# Altium PCB RSD_M1_LED_TURN_LEFT_V2.PcbDoc
Units mm, origin at the board's own origin, x right, y up, seen from the top; angles counter-clockwise.
Board outline 79.21 x 29.58 mm, 2 copper layers (Top Layer, Bottom Layer), stack 0.871 mm thick; 29 components, 45 nets, 68 pads, 25 vias.
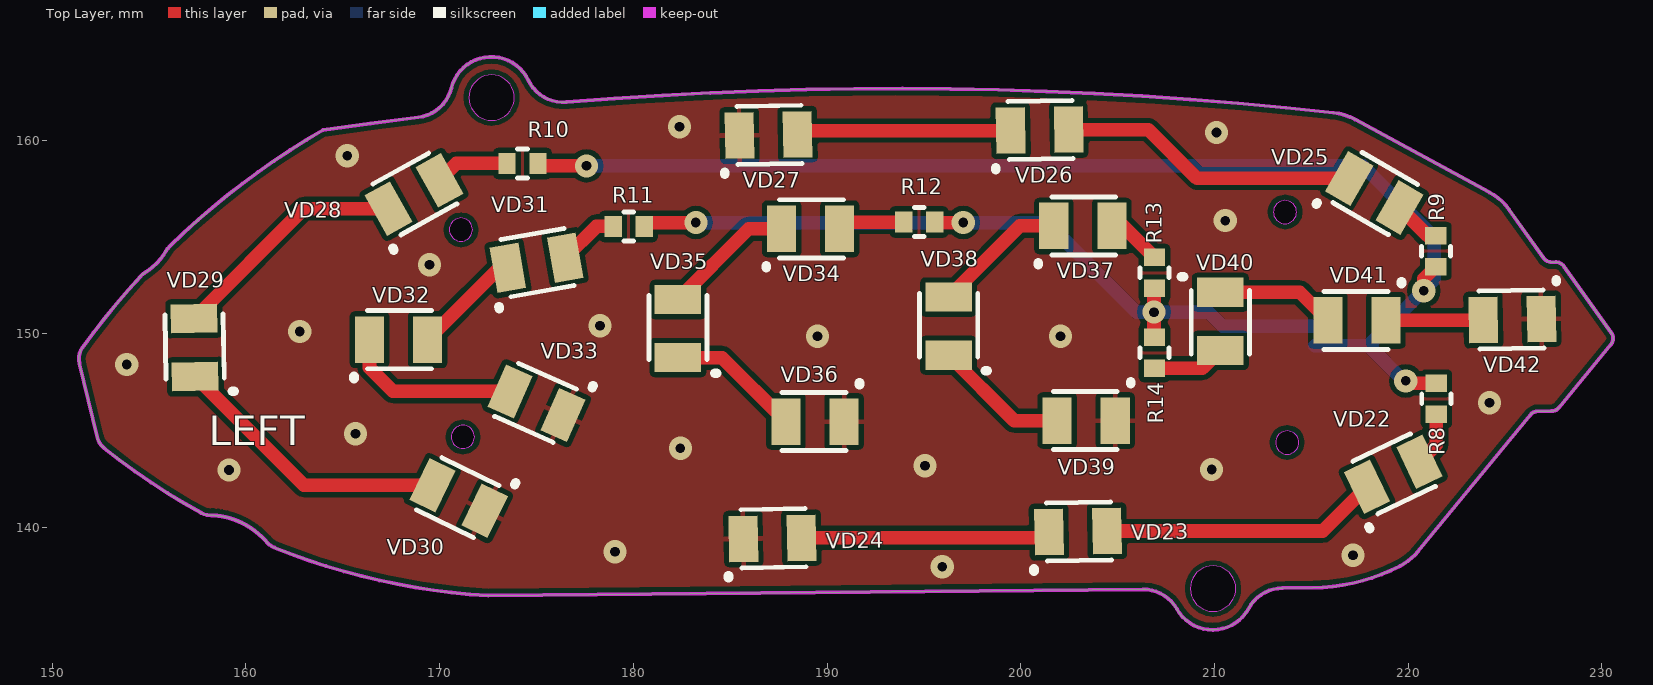
[diagram p0: Top Layer view]
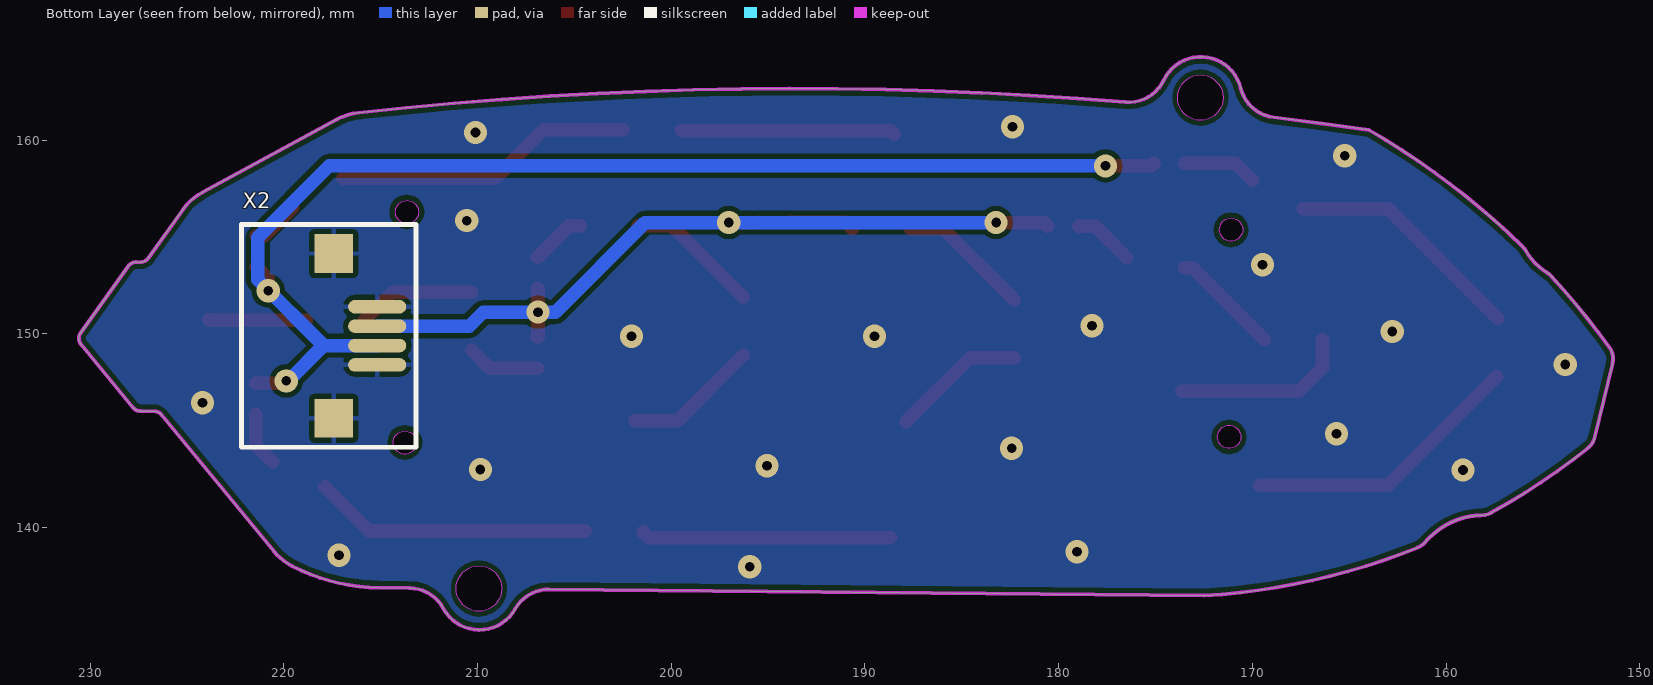
[diagram p1: Bottom Layer view, seen from below]
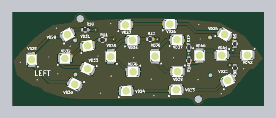
[diagram p2: 3D render of the assembled board from above, using the file's embedded part models]

## Layer stack, top to bottom
Top Solder: solder mask 0.0102, Solder Resist, Dk 3.5
Top Layer: signal copper 0.0356
Dielectric 1: dielectric 0.8, FR-4, Dk 4.8
Bottom Layer: signal copper 0.0356
Bottom Solder: solder mask 0.0102, Solder Resist, Dk 3.5

## Board outline
416 vertices, not listed, extent 151.371,134.721 230.579,164.303
cut-out: 213.038,156.291 ccw(c213.638,156.291) 213.638,155.691 ccw(c213.638,156.291) 214.238,156.291 ccw(c213.638,156.291) 213.638,156.891 ccw(c213.638,156.291)
cut-out: 213.152,144.392 ccw(c213.752,144.392) 213.752,143.792 ccw(c213.752,144.392) 214.352,144.392 ccw(c213.752,144.392) 213.752,144.992 ccw(c213.752,144.392)
cut-out: 208.749,136.855 ccw(c209.924,136.855) 209.924,135.68 ccw(c209.924,136.855) 211.099,136.855 ccw(c209.924,136.855) 209.924,138.03 ccw(c209.924,136.855)
cut-out: 170.597,144.685 ccw(c171.197,144.685) 171.197,144.085 ccw(c171.197,144.685) 171.797,144.685 ccw(c171.197,144.685) 171.197,145.285 ccw(c171.197,144.685)
cut-out: 170.495,155.385 ccw(c171.095,155.385) 171.095,154.785 ccw(c171.095,155.385) 171.695,155.385 ccw(c171.095,155.385) 171.095,155.985 ccw(c171.095,155.385)
cut-out: 171.505,162.2 ccw(c172.68,162.2) 172.68,161.025 ccw(c172.68,162.2) 173.855,162.2 ccw(c172.68,162.2) 172.68,163.375 ccw(c172.68,162.2)

## Design rules (kind name [scope] priority, off if disabled: settings)
Clearance [All] p1: gap=0.254 ignorepadtopadclearanceinfootprint=FALSE except(0: Arc-Hole Track-Hole SMDPad-Hole THPad-Hole Via-Hole Fill-Hole Poly-Hole Region-Hole Text-Hole)
PolygonConnect [All] p1: thpad.connectstyle=Relief thpad.reliefconductorwidth=0.254 thpad.reliefentries=4 thpad.polygonreliefangle="90 Angle" thpad.airgapwidth=0.254 smdpad.connectstyle=Relief smdpad.reliefconductorwidth=0.254 smdpad.reliefentries=4 smdpad.polygonreliefangle="90 Angle" smdpad.airgapwidth=0.254 via.connectstyle=Direct via.reliefconductorwidth=0.254 via.reliefentries=4 via.polygonreliefangle="90 Angle" via.airgapwidth=0.254
RoutingVias [All] p1: holewidth=0.711 width=1.27 viastyle="Through Hole" minholewidth=0.711 minwidth=1.27 maxholewidth=0.711 maxwidth=1.27
SolderMaskExpansion [All] p1: expansion=0.102
Width [All] p1: maxlimit=2 minlimit=0.254 preferedwidth=0.7
30 further rules are at their usual default settings.

## Components (designator, comment, footprint, x,y, rotation, side; value= is the part's Value field where it differs from the comment)
R8 "Resistor" Res0603 221.45,146.65 r90 top value="200 Om"
R9 "Resistor" Res0603 221.425,154.275 r270 top value="200 Om"
R10 "Resistor" Res0603 174.275,158.8 r0 top value="200 Om"
R11 "Resistor" Res0603 179.75,155.55 r0 top value="200 Om"
R12 "Resistor" Res0603 194.75,155.775 r0 top value="200 Om"
R13 "Resistor" Res0603 206.9,153.15 r270 top value="200 Om"
R14 "Resistor" Res0603 206.9,149.025 r90 top value="200 Om"
VD22 "LED" 3528_LED 219.225,142.75 r205.5 top value=WHITE
VD23 "LED" 3528_LED 202.95,139.8 r181 top value=WHITE
VD24 "LED" 3528_LED 187.175,139.45 r181 top value=WHITE
VD25 "LED" 3528_LED 218.25,157.275 r150 top value=WHITE
VD26 "LED" 3528_LED 200.975,160.525 r181 top value=WHITE
VD27 "LED" 3528_LED 186.975,160.276 r181 top value=WHITE
VD28 "LED" 3528_LED 168.675,157.2 r209 top value=WHITE
VD29 "LED" 3528_LED 157.35,149.3 r271 top value=WHITE
VD30 "LED" 3528_LED 170.975,141.525 r334 top value=WHITE
VD31 "LED" 3528_LED 175,153.675 r190 top value=YELLOW
VD32 "LED" 3528_LED 167.875,149.7 r180 top value=YELLOW
VD33 "LED" 3528_LED 175,146.425 r336 top value=YELLOW
VD34 "LED" 3528_LED 189.15,155.425 r180 top value=YELLOW
VD35 "LED" 3528_LED 182.3,150.275 r270 top value=YELLOW
VD36 "LED" 3528_LED 189.375,145.475 r0 top value=YELLOW
VD37 "LED" 3528_LED 203.2,155.575 r180 top value=YELLOW
VD38 "LED" 3528_LED 196.275,150.4 r270 top value=YELLOW
VD39 "LED" 3528_LED 203.375,145.525 r0 top value=YELLOW
VD40 "LED" 3528_LED 210.3,150.65 r90 top value=YELLOW
VD41 "LED" 3528_LED 217.35,150.7 r0 top value=YELLOW
VD42 "LED" 3528_LED 225.375,150.75 r1 top value=YELLOW
X2 "FPC_connector_4_1" FPC_4_1 218.175,149.9 r270 bottom value=0522070433

## Footprints (in the part's own frame and the unit in brackets; to place one, negate y for a bottom-side part, rotate by r counter-clockwise, add the part's x,y. Pads: shape width x height; smd on the part's side, far side on the other; paste and mask are expansions set on the pad)
3528_LED [mm]
  rect 1.5x2.4 smd: 1(1.5,0) 2(-1.5,0)
  silkscreen extent -1.7,-1.5 2.3,2, body extent -1.75,-1.4 1.75,1.4, height 1.9
FPC_4_1 [mm]
  rect 2x2 smd: 0(-4.25,0.75) 0(4.25,0.75)
  oval 0.7x3 smd: 1(-1.5,3) 2(-0.5,3) 3(0.5,3) 4(1.5,3)
  silkscreen extent -5.75,-4 5.75,5, body extent -5.15,-3.8 5.15,3.8, height 2.7
Res0603 [mm]
  rect 0.9x1.1 smd: 1(-0.8,0) 2(0.8,0)
  silkscreen extent -0.25,-0.75 0.25,0.75, body extent -0.85,-0.43 0.85,0.43, height 0.5

## Part data
X2: 1=GND, 2=GABARIT, 3=TURN, 4=GND

## Free pads (board coordinates)
  round 0 hole 1.25: 5(171.1,155.375) 5(171.2,144.675) 5(213.65,156.3) 5(213.75,144.4)
  round 0 hole 2.35: 5(172.675,162.2) 5(209.925,136.85)

## Via types
v1: diameter 1.2, hole 0.5, Top Layer to Bottom Layer, tented both sides, 25 vias

## Nets (pads, with @x,y where several pads share a name; then routed paths per layer and width w, separated by ;. In a path a pad name is that pad's centre, name@x,y a point inside that pad or via, vN(x,y) a via of type N, cw(c..) or ccw(c..) an arc to the next point about the centre after c; other vN are vias at no path point)
GABARIT: R8.2 R9.2 R10.2 X2.3 | length 63.4
  Top Layer w0.7: R10.2 175.2,158.675 v1(177.575,158.675) ; v1(219.875,147.575) 220,147.45 R8.2 ; v1(220.8,152.225) 220.8,152.85 R9.2
  Bottom Layer w0.7: v1(177.575,158.675) 217.65,158.675 221.35,154.975 221.35,152.8 217.95,149.4 ; X2.3 217.95,149.4 ; v1(219.875,147.575) 219.775,147.575 217.95,149.4
GND: VD24.1 VD27.1 VD30.1 VD33.1 VD36.1 VD39.1 VD42.1 X2.0 X2.1 X2.4
  other v1: 195.95,137.975 217.15,138.575 179.05,138.75 159.125,142.975 209.85,143 195.05,143.2 182.425,144.1 165.65,144.85 224.2,146.45 153.85,148.425 189.5,149.875 202.05,149.875 162.775,150.125 178.275,150.425 169.475,153.575 210.55,155.85 165.225,159.2 210.1,160.4 182.375,160.7
NetR1_1: 
NetR2_1: 
NetR3_1: 
NetR4_1: 
NetR5_1: 
NetR6_1: 
NetR7_1: 
NetR8_1: R8.1 VD22.2 | length 2.8
  Top Layer w0.7: VD22.2 221.45,144.267 R8.1
NetR9_1: R9.1 VD25.2 | length 2.5
  Top Layer w0.7: VD25.2 220.999,155.075 R9.1
NetR10_1: R10.1 VD28.2 | length 3.8
  Top Layer w0.7: VD28.2 170.86,158.8 R10.1
NetR11_1: R11.1 VD31.2 | length 3.1
  Top Layer w0.7: VD31.2 178.092,155.55 R11.1
NetR12_1: R12.1 VD34.2 | length 3.4
  Top Layer w0.7: VD34.2 191,155.775 R12.1
NetR13_1: R13.1 VD37.2 | length 2.9
  Top Layer w0.7: VD37.2 205.275,155.575 R13.1
NetR14_1: R14.1 VD40.2 | length 3.8
  Top Layer w0.7: R14.1 209.375,148.225 VD40.2
NetVD1_1: 
NetVD2_1: 
NetVD4_1: 
NetVD5_1: 
NetVD7_1: 
NetVD8_1: 
NetVD10_1: 
NetVD11_1: 
NetVD13_1: 
NetVD14_1: 
NetVD16_1: 
NetVD17_1: 
NetVD19_1: 
NetVD20_1: 
NetVD22_1: VD22.1 VD23.2 | length 14.4
  Top Layer w0.7: VD23.2 215.593,139.826 VD22.1
NetVD23_1: VD23.1 VD24.2 | length 12.9
  Top Layer w0.7: VD24.2 201.153,139.476 VD23.1
NetVD25_1: VD25.1 VD26.2 | length 15.5
  Top Layer w0.7: VD26.2 206.574,160.551 209.1,158.025 VD25.1
NetVD26_1: VD26.1 VD27.2 | length 11.1
  Top Layer w0.7: VD27.2 188.671,160.499 VD26.1
NetVD28_1: VD28.1 VD29.2 | length 12.4
  Top Layer w0.7: VD29.2 162.997,156.473 VD28.1
NetVD29_1: VD29.1 VD30.2 | length 14.6
  Top Layer w0.7: VD29.1 162.994,142.183 VD30.2
NetVD31_1: VD31.1 VD32.2 | length 5.7
  Top Layer w0.7: VD32.2 173.09,153.415 VD31.1
NetVD32_1: VD32.1 VD33.2 | length 9.2
  Top Layer w0.7: VD32.1 166.375,148.25 167.59,147.035 VD33.2
NetVD34_1: VD34.1 VD35.2 | length 6.9
  Top Layer w0.7: VD35.2 185.95,155.425 VD34.1
NetVD35_1: VD35.1 VD36.2 | length 6.9
  Top Layer w0.7: VD35.1 184.575,148.775 VD36.2
NetVD37_1: VD37.1 VD38.2 | length 6.9
  Top Layer w0.7: VD38.2 199.95,155.575 VD37.1
NetVD38_1: VD38.1 VD39.2 | length 7
  Top Layer w0.7: VD38.1 199.65,145.525 VD39.2
NetVD40_1: VD40.1 VD41.2 | length 6.2
  Top Layer w0.7: VD40.1 214.4,152.15 VD41.2
NetVD41_1: VD41.1 VD42.2 | length 5
  Top Layer w0.7: VD41.1 223.851,150.7 VD42.2
TURN_SIGNAL: R11.2 R12.2 R13.2 R14.2 X2.2 | length 41
  Top Layer w0.7: R11.2 180.75,155.75 v1(183.225,155.75) ; R12.2 195.575,155.75 v1(197.025,155.75) ; R14.2 206.875,149.85 v1(206.875,151.125) 206.875,152.325 R13.2
  Bottom Layer w0.7: v1(183.225,155.75) v1(197.025,155.75) 201.35,155.75 205.975,151.125 v1(206.875,151.125) 209.7,151.125 210.425,150.4 X2.2

## Polygon pours and split planes (outlines as drawn)
GND on Bottom Layer "Top Layer, Top-No Net" (solid, pour order 6): 559 vertices, not listed, extent 151.202,134.588 230.722,164.481
GND on Top Layer "Top Layer, Top-No Net" (solid, pour order 7): 559 vertices, not listed, extent 151.205,134.571 230.725,164.464

## Keep-outs
Keep-Out Layer:
  lines w0.2: 151.557,149.298 ccw(c152.364,148.717) 151.397,148.484 cw(c151.392,148.483) 151.397,148.484 152.318,144.659 cw(c152.313,144.657) 152.319,144.659 ccw(c153.285,144.892) 152.663,144.116 ; 151.557,149.299 ccw(c152.364,148.717) 151.557,149.298 ; 151.557,149.298 ccw(c151.553,149.302) 151.557,149.299 ; 151.557,149.299 cw(c183.995,125.904) 154.569,152.99 ; 151.557,149.298 151.557,149.299 ; 152.664,144.115 ccw(c174.547,171.423) 157.686,140.759 ; 152.664,144.115 ccw(c152.66,144.111) 152.663,144.116 ; 154.569,152.99 ccw(c154.565,152.994) 154.57,152.99 ; 154.57,152.99 ccw(c155.301,152.317) 154.569,152.99 ; 154.57,152.99 cw(c155.301,152.317) 154.778,153.162 ; 154.569,152.99 154.57,152.99 ; 154.569,152.99 154.569,152.99 ; 154.778,153.162 cw(c155.301,152.317) 154.778,153.163 ; 154.778,153.162 ccw(c154.776,153.167) 154.778,153.163 ; 154.778,153.162 154.778,153.163 ; 154.778,153.163 ccw(c153.07,155.929) 155.885,154.303 ccw(c155.881,154.306) 155.886,154.303 cw(c156.747,153.805) 156.051,154.517 ; 156.052,154.517 ccw(c156.747,153.805) 156.051,154.517 ; 156.051,154.517 ccw(c156.048,154.521) 156.052,154.517 ; 156.052,154.517 cw(c183.995,125.904) 163.976,160.528 ; 156.051,154.517 156.052,154.517 ; 156.051,154.517 156.051,154.517 ; 157.686,140.759 ccw(c158.165,141.631) 158.145,140.636 ccw(c158.165,141.631) 158.156,140.636 ; 157.686,140.759 ccw(c158.165,141.631) 157.686,140.759 ; 157.686,140.759 ccw(c157.683,140.754) 157.686,140.759 ; 157.686,140.759 157.686,140.759 ; 157.686,140.759 157.686,140.759 ; 158.156,140.636 ccw(c158.156,140.631) 158.156,140.636 ; 158.156,140.636 158.177,140.636 ; 158.156,140.636 158.156,140.636 ; 158.177,140.636 ccw(c158.177,140.63) 158.177,140.636 ; 158.177,140.636 158.209,140.635 ; 158.21,140.635 ccw(c158.209,140.63) 158.209,140.635 ; 158.21,140.635 158.242,140.634 ; 158.209,140.635 158.21,140.635 ; 158.209,140.635 158.21,140.635 ; 158.242,140.634 158.274,140.633 ; 158.242,140.634 158.242,140.634 ; 158.242,140.634 158.242,140.634 ; 158.274,140.633 ccw(c158.274,140.628) 158.274,140.633 ; 158.274,140.633 158.306,140.631 ; 158.306,140.631 ccw(c158.306,140.626) 158.306,140.631 ; 158.306,140.631 158.339,140.63 ; 158.339,140.63 ccw(c158.338,140.624) 158.339,140.63 ; 158.339,140.63 158.371,140.628 ; 158.371,140.628 ccw(c158.371,140.622) 158.371,140.628 ; 158.371,140.628 158.403,140.625 ; 158.403,140.625 ccw(c158.403,140.62) 158.403,140.625 ; 158.403,140.625 158.436,140.623 ; 158.436,140.622 ccw(c158.435,140.617) 158.436,140.623 ; 158.436,140.623 158.468,140.62 ; 158.436,140.623 158.436,140.623 ; 158.436,140.623 158.436,140.623 ; 158.468,140.62 ccw(c158.468,140.614) 158.468,140.62 ; 158.468,140.62 158.5,140.616 ; 158.468,140.62 158.468,140.62 ; 158.5,140.616 ccw(c158.5,140.611) 158.5,140.616 ; 158.5,140.616 158.533,140.613 ; 158.5,140.616 158.5,140.616 ; 158.533,140.613 ccw(c158.532,140.607) 158.533,140.613 ; 158.533,140.613 158.565,140.609 ; 158.533,140.613 158.533,140.613 ; 158.533,140.613 158.533,140.613 ; 158.565,140.609 ccw(c158.564,140.604) 158.565,140.609 ; 158.565,140.609 158.597,140.605 ; 158.565,140.609 158.565,140.609 ; 158.597,140.605 158.63,140.601 ; 158.597,140.605 158.597,140.605 ; 158.597,140.605 158.597,140.605 ; 158.63,140.601 ccw(c158.629,140.595) 158.63,140.601 ; 158.63,140.601 158.662,140.596 ; 158.662,140.596 ccw(c158.661,140.591) 158.662,140.596 ; 158.662,140.596 158.694,140.591 ; 158.662,140.596 158.662,140.596 ; 158.662,140.596 158.662,140.596 ; 158.694,140.591 ccw(c158.693,140.586) 158.694,140.591 ; 158.694,140.591 158.726,140.586 ; 158.726,140.586 ccw(c158.725,140.58) 158.726,140.586 ; 158.726,140.586 158.759,140.58 ; 158.759,140.58 ccw(c158.758,140.575) 158.759,140.58 ; 158.759,140.58 158.791,140.574 158.791,140.574 ; 158.759,140.58 158.759,140.58 ; 158.759,140.58 158.759,140.58 ; 158.791,140.574 158.823,140.568 ; 158.791,140.574 158.791,140.574 ; 158.791,140.574 158.791,140.574 ; 158.823,140.568 cw(c158.822,140.563) 158.823,140.568 ; 158.823,140.568 ccw(c158.822,140.563) 158.823,140.568 ; 158.823,140.568 158.823,140.568 ; 158.823,140.568 158.823,140.568 ; 158.823,140.568 158.823,140.568 ; 158.823,140.568 158.823,140.568 ; 158.823,140.568 158.855,140.562 ; 158.855,140.562 ccw(c158.854,140.557) 158.855,140.562 ; 158.855,140.562 158.887,140.555 ; 158.887,140.555 ccw(c158.886,140.55) 158.887,140.555 ; 158.887,140.555 ccw(c158.886,140.55) 158.887,140.555 ; 158.887,140.555 158.919,140.548 ; 158.887,140.555 158.887,140.555 ; 158.919,140.548 ccw(c158.918,140.543) 158.919,140.548 ; 158.919,140.548 ccw(c158.918,140.543) 158.919,140.548 ; 158.919,140.548 158.951,140.541 ; 158.919,140.548 158.919,140.548 ; 158.919,140.548 158.919,140.548 ; 158.919,140.548 158.919,140.548 ; 158.951,140.541 158.983,140.534 cw(c158.982,140.528) 158.983,140.534 159.015,140.526 ; 158.951,140.541 158.951,140.541 ; 158.951,140.541 158.951,140.541 ; 159.015,140.526 ccw(c159.014,140.521) 159.015,140.526 ; 159.015,140.526 159.047,140.518 ; 159.047,140.518 159.079,140.509 ; 159.047,140.518 159.047,140.518 ; 159.047,140.518 159.047,140.518 ; 159.079,140.509 ccw(c159.077,140.504) 159.079,140.509 ; 159.079,140.509 159.11,140.501 ; 159.111,140.501 ccw(c159.109,140.496) 159.11,140.501 ; 159.111,140.501 159.142,140.492 ; 159.142,140.492 ccw(c159.141,140.487) 159.142,140.492 ; 159.142,140.492 159.174,140.483 ; 159.142,140.492 159.142,140.492 ; 159.174,140.483 ccw(c159.172,140.478) 159.174,140.483 ; 159.174,140.483 159.205,140.473 ; 159.174,140.483 159.174,140.483 ; 159.205,140.473 159.205,140.473 159.237,140.464 159.268,140.454 ; 159.205,140.473 159.205,140.473 ; 159.268,140.454 ccw(c159.267,140.448) 159.268,140.454 ; 159.268,140.454 159.3,140.443 ; 159.3,140.443 ccw(c159.298,140.438) 159.3,140.443 ; 159.3,140.443 159.331,140.433 ; 159.3,140.443 159.3,140.443 ; 159.3,140.443 159.3,140.443 ; 159.331,140.433 ccw(c159.329,140.428) 159.331,140.433 ; 159.331,140.433 cw(c159.329,140.428) 159.331,140.433 ; 159.331,140.433 159.331,140.433 ; 159.331,140.433 159.331,140.433 ; 159.331,140.433 159.331,140.433 ; 159.331,140.433 159.362,140.422 ; 159.362,140.422 ccw(c159.36,140.417) 159.362,140.422 ; 159.362,140.422 ccw(c159.36,140.417) 159.362,140.422 ; 159.362,140.422 159.393,140.411 ; 159.362,140.422 159.362,140.422 ; 159.362,140.422 159.362,140.422 ; 159.362,140.422 159.362,140.422 ; 159.393,140.411 ccw(c159.392,140.406) 159.393,140.411 ; 159.393,140.411 159.424,140.399 ; 159.393,140.411 159.393,140.411 ; 159.424,140.399 ccw(c159.423,140.394) 159.424,140.399 ; 159.424,140.399 159.455,140.388 cw(c159.454,140.383) 159.455,140.388 159.486,140.376 ; 159.424,140.399 159.424,140.399 ; 159.486,140.376 ccw(c159.484,140.371) 159.486,140.376 ; 159.486,140.376 159.517,140.364 ; 159.517,140.364 ccw(c159.515,140.359) 159.517,140.364 ; 159.517,140.364 159.548,140.351 ; 159.517,140.364 159.517,140.364 ; 159.517,140.364 159.517,140.364 ; 159.548,140.351 ccw(c159.546,140.346) 159.548,140.351 ; 159.548,140.351 159.579,140.339 ; 159.579,140.339 ccw(c159.577,140.334) 159.579,140.339 ; 159.579,140.339 159.609,140.326 ; 159.609,140.326 ccw(c159.607,140.321) 159.609,140.326 ; 159.609,140.326 159.64,140.312 ; 159.64,140.312 ccw(c159.638,140.307) 159.64,140.312 ; 159.64,140.312 159.67,140.299 ; 159.64,140.312 159.64,140.312 ; 159.64,140.312 159.64,140.312 ; 159.67,140.299 ccw(c159.668,140.294) 159.67,140.299 ; 159.67,140.299 159.7,140.285 ; 159.7,140.285 ccw(c159.698,140.28) 159.7,140.285 ; 159.7,140.285 159.73,140.271 ; 159.731,140.271 ccw(c159.728,140.266) 159.73,140.271 ; 159.731,140.271 159.761,140.257 ; 159.761,140.257 ccw(c159.758,140.252) 159.761,140.257 ; 159.761,140.257 159.79,140.242 ; 159.761,140.257 159.761,140.257 ; 159.791,140.242 159.82,140.227 ; 159.791,140.242 159.791,140.242 ; 159.79,140.242 159.791,140.242 ; 159.82,140.227 ccw(c159.818,140.223) 159.82,140.227 ; 159.82,140.227 159.85,140.212 ; 159.85,140.212 ccw(c159.848,140.208) 159.85,140.212 ; 159.85,140.212 159.88,140.197 159.88,140.197 ; 159.85,140.212 159.85,140.212 ; 159.85,140.212 159.85,140.212 ; 159.88,140.197 ccw(c159.877,140.192) 159.88,140.197 ; 159.88,140.197 159.909,140.182 ; 159.909,140.181 159.939,140.166 ; 159.909,140.182 159.909,140.181 ; 159.909,140.182 159.909,140.182 ; 159.939,140.166 ccw(c159.936,140.161) 159.939,140.166 ; 159.939,140.166 159.968,140.15 ; 159.968,140.15 ccw(c159.965,140.145) 159.968,140.15 ; 159.968,140.15 159.997,140.133 ; 159.997,140.133 ccw(c159.994,140.129) 159.997,140.133 ; 159.997,140.133 160.026,140.117 ; 159.997,140.133 159.997,140.133 ; 159.997,140.133 159.997,140.133 ; 160.026,140.117 ccw(c160.023,140.112) 160.026,140.117 ; 160.026,140.117 ccw(c160.023,140.112) 160.026,140.117 ; 160.026,140.117 160.055,140.1 cw(c160.052,140.095) 160.055,140.1 ; 160.026,140.117 160.026,140.117 ; 160.026,140.117 160.026,140.117 ; 160.026,140.117 160.026,140.117 ; 160.055,140.1 160.084,140.083 ; 160.055,140.1 160.055,140.1 ; 160.084,140.083 ccw(c160.081,140.078) 160.084,140.083 ; 160.084,140.083 ccw(c160.081,140.078) 160.084,140.083 ; 160.084,140.083 160.112,140.066 ; 160.084,140.083 160.084,140.083 ; 160.084,140.083 160.084,140.083 ; 160.084,140.083 160.084,140.083 ; 160.112,140.065 ccw(c160.11,140.061) 160.112,140.066 ; 160.112,140.065 ccw(c160.11,140.061) 160.112,140.066 ; 160.112,140.065 160.141,140.048 ; 160.112,140.066 160.112,140.065 ; 160.112,140.066 160.112,140.066 ; 160.112,140.065 160.112,140.065 ; 160.141,140.048 ccw(c160.138,140.043) 160.141,140.048 ; 160.141,140.048 160.169,140.03 ; 160.169,140.03 ccw(c160.166,140.026) 160.169,140.03 ; 160.169,140.03 160.197,140.012 ; 160.197,140.012 ccw(c160.195,140.008) 160.197,140.012 ; 160.197,140.012 160.225,139.994 ; 160.226,139.994 ccw(c160.223,139.989) 160.225,139.994 ; 160.226,139.994 160.253,139.975 ; 160.253,139.975 160.281,139.957 ; 160.253,139.975 160.253,139.975 ; 160.253,139.975 160.253,139.975 ; 160.281,139.957 ccw(c160.278,139.952) 160.281,139.957 ; 160.281,139.957 160.309,139.938 ; 160.309,139.938 ccw(c160.306,139.933) 160.309,139.938 ; 160.309,139.938 160.336,139.918 ; 160.336,139.918 ccw(c160.333,139.914) 160.336,139.918 ; 160.336,139.918 160.364,139.899 ; 160.364,139.899 ccw(c160.361,139.895) 160.364,139.899 ; 160.364,139.899 160.391,139.879 ; 160.391,139.879 ccw(c160.388,139.875) 160.391,139.879 ; 160.391,139.879 160.418,139.859 ; 160.391,139.879 160.391,139.879 ; 160.418,139.859 ccw(c160.415,139.855) 160.418,139.859 ; 160.418,139.859 160.445,139.839 ; 160.445,139.839 cw(c160.442,139.835) 160.445,139.839 ; 160.445,139.839 160.445,139.839 ; 160.445,139.839 160.445,139.839 ; 160.445,139.839 160.471,139.819 ; 160.471,139.819 ccw(c160.468,139.815) 160.471,139.819 ; 160.471,139.819 cw(c160.468,139.815) 160.472,139.819 ; 160.471,139.819 160.472,139.819 ; 160.471,139.819 160.472,139.819 ; 160.471,139.819 160.471,139.819 ; 160.472,139.819 160.498,139.798 ; 160.498,139.798 ccw(c160.495,139.794) 160.498,139.798 ; 160.498,139.798 160.524,139.777 ; 160.524,139.777 ccw(c160.521,139.773) 160.524,139.777 ; 160.524,139.777 160.551,139.756 ; 160.551,139.756 ccw(c160.547,139.752) 160.551,139.756 ; 160.551,139.756 ccw(c160.547,139.752) 160.551,139.756 ; 160.551,139.756 160.577,139.735 ; 160.551,139.756 160.551,139.756 ; 160.551,139.756 160.551,139.756 ; 160.551,139.756 160.551,139.756 ; 160.577,139.735 ccw(c160.573,139.731) 160.577,139.735 ; 160.577,139.735 ccw(c160.573,139.731) 160.577,139.735 ; 160.577,139.735 160.602,139.714 ; 160.577,139.735 160.577,139.735 ; 160.577,139.735 160.577,139.735 ; 160.577,139.735 160.577,139.735 ; 160.603,139.714 ccw(c160.599,139.709) 160.602,139.714 ; 160.603,139.714 160.628,139.692 ; 160.628,139.692 ccw(c160.625,139.688) 160.628,139.692 ; 160.628,139.692 ccw(c160.625,139.688) 160.628,139.692 ; 160.628,139.692 160.654,139.67 ; 160.628,139.692 160.628,139.692 ; 160.628,139.692 160.628,139.692 ; 160.628,139.692 160.628,139.692 ; 160.654,139.67 ccw(c160.65,139.666) 160.654,139.67 ; 160.654,139.67 160.679,139.648 ; 160.679,139.648 ccw(c160.675,139.644) 160.679,139.648 ; 160.679,139.648 160.704,139.626 ; 160.704,139.626 ccw(c160.701,139.622) 160.704,139.626 ; 160.704,139.626 160.729,139.603 ; 160.729,139.603 ccw(c160.726,139.599) 160.729,139.603 ; 160.729,139.603 160.754,139.58 ; 160.754,139.58 ccw(c160.75,139.576) 160.754,139.58 ; 160.754,139.58 160.779,139.557 ; 160.754,139.58 160.754,139.58 ; 160.779,139.557 ccw(c160.775,139.553) 160.779,139.557 ; 160.779,139.557 160.803,139.534 160.803,139.534 ; 160.779,139.557 160.779,139.557 ; 160.803,139.534 160.827,139.511 ; 160.803,139.534 160.803,139.534 ; 160.827,139.511 ccw(c160.824,139.507) 160.827,139.511 ; 160.827,139.511 160.851,139.487 ; 160.827,139.511 160.827,139.511 ; 160.827,139.511 160.827,139.511 ; 160.851,139.487 ccw(c160.848,139.483) 160.851,139.487 ; 160.851,139.487 160.875,139.464 ; 160.875,139.463 ccw(c160.871,139.46) 160.875,139.464 ; 160.875,139.463 160.899,139.44 ; 160.875,139.464 160.875,139.463 ; 160.875,139.464 160.875,139.463 ; 160.899,139.44 ccw(c160.895,139.436) 160.899,139.44 ; 160.899,139.44 160.922,139.415 ; 160.922,139.415 ccw(c160.918,139.412) 160.922,139.415 ; 160.922,139.415 160.946,139.391 ; 160.946,139.391 ccw(c160.942,139.387) 160.946,139.391 ; 160.946,139.391 160.969,139.367 ; 160.969,139.366 ccw(c160.965,139.363) 160.969,139.367 ; 160.969,139.366 ccw(c160.965,139.363) 160.969,139.367 ; 160.969,139.366 161.08,139.242 ; 160.969,139.367 160.969,139.366 ; 160.969,139.366 160.969,139.366 ; 161.081,139.241 ccw(c161.836,139.89) 161.464,138.967 ; 161.081,139.242 161.081,139.241 ; 161.08,139.242 161.081,139.242 ; 161.464,138.967 ccw(c174.547,171.423) 172.505,136.488 206.295,136.811 ; 161.464,138.967 ccw(c161.462,138.962) 161.464,138.967 ; 161.464,138.967 cw(c161.836,139.89) 161.464,138.967 ; 161.464,138.967 161.464,138.967 ; 161.464,138.967 161.464,138.967 ; 163.976,160.528 cw(c193.54,-42.324) 168.896,161.184 ; 163.976,160.528 163.976,160.528 ; 168.896,161.184 ccw(c168.654,163.175) 168.896,161.184 ; 168.896,161.184 ccw(c168.654,163.175) 170.601,162.694 ; 168.896,161.184 168.896,161.184 ; 170.601,162.694 ccw(c170.596,162.695) 170.601,162.694 ; 170.601,162.694 cw(c172.659,162.186) 170.601,162.694 ; 170.601,162.694 170.601,162.694 ; 170.601,162.694 170.601,162.694 ; 170.601,162.694 cw(c172.659,162.186) 174.572,163.099 ; 174.572,163.099 cw(c174.577,163.102) 174.572,163.099 ; 174.572,163.099 cw(c176.381,163.963) 174.572,163.099 ; 174.572,163.099 ccw(c176.381,163.963) 176.548,161.965 ccw(c176.547,161.97) 176.548,161.965 ; 174.572,163.099 174.572,163.099 ; 174.572,163.099 174.572,163.099 ; 176.548,161.965 cw(c193.54,-42.324) 216.149,161.42 ; 176.548,161.965 176.548,161.965 ; 206.295,136.811 cw(c206.314,134.806) 208.059,135.795 ccw(c209.903,136.84) 211.766,135.83 ; 206.295,136.811 ccw(c206.295,136.806) 206.295,136.811 ; 206.295,136.811 206.295,136.811 ; 206.295,136.811 206.295,136.811 ; 206.295,136.811 206.295,136.811 ; 211.766,135.83 cw(c213.53,134.875) 213.51,136.88 ; 211.766,135.83 ccw(c209.903,136.84) 211.766,135.83 ; 211.766,135.83 211.766,135.83 ; 213.51,136.88 ccw(c213.51,136.875) 213.51,136.88 ; 213.51,136.88 215.066,136.895 cw(c215.066,136.89) 215.066,136.895 ccw(c214.971,146.889) 219.572,138.017 ; 213.51,136.88 213.51,136.88 ; 216.149,161.42 ccw(c216.15,161.425) 216.149,161.42 ; 216.149,161.42 cw(c215.819,158.443) 217.246,161.076 ; 216.149,161.42 216.149,161.42 ; 217.246,161.076 217.246,161.076 ; 217.246,161.076 217.246,161.076 ; 217.246,161.076 224.198,157.309 ; 219.572,138.017 ccw(c218.193,140.675) 220.505,138.772 ; 219.572,138.017 ccw(c218.193,140.675) 219.572,138.017 ; 219.572,138.017 219.572,138.017 ; 220.505,138.772 ccw(c218.193,140.675) 220.506,138.772 ; 220.506,138.772 226.307,145.822 ; 220.506,138.772 220.506,138.772 ; 224.198,157.309 ccw(c224.201,157.314) 224.198,157.309 ; 224.198,157.309 cw(c222.772,154.676) 225.208,156.417 ; 225.208,156.417 ccw(c225.212,156.42) 225.208,156.417 ; 225.208,156.417 226.996,153.914 ; 226.307,145.822 cw(c226.698,145.501) 226.693,146.006 ; 226.307,145.822 ccw(c226.312,145.819) 226.307,145.822 ; 226.307,145.822 226.307,145.822 ; 226.307,145.822 226.307,145.822 ; 226.693,146.006 ccw(c226.698,145.501) 226.693,146.006 ; 226.693,146.006 227.401,146.013 ; 226.693,146.006 226.693,146.006 ; 226.996,153.914 ccw(c227.407,154.208) 226.996,153.914 ; 226.996,153.914 ccw(c227.407,154.208) 227.412,153.703 ; 226.996,153.914 226.996,153.914 ; 226.996,153.914 226.996,153.914 ; 227.401,146.013 ccw(c227.397,146.508) 227.779,146.193 ; 227.401,146.013 ccw(c227.401,146.008) 227.401,146.013 ; 227.412,153.703 ccw(c227.412,153.708) 227.412,153.703 227.624,153.705 ; 227.412,153.703 227.412,153.703 ; 227.624,153.705 ccw(c227.624,153.71) 227.624,153.705 ; 227.624,153.705 227.624,153.705 ; 227.624,153.705 227.624,153.705 ; 227.624,153.705 cw(c227.629,153.21) 228.031,153.498 ; 227.779,146.194 ccw(c227.783,146.19) 227.779,146.193 ; 227.779,146.194 230.466,149.459 ; 228.031,153.498 228.031,153.498 ; 228.031,153.498 228.031,153.498 ; 228.031,153.498 230.487,150.061 ; 230.467,149.46 ccw(c230.084,149.774) 230.579,149.774 ccw(c230.084,149.774) 230.487,150.061 ; 230.467,149.46 ccw(c230.47,149.456) 230.466,149.459 ; 230.487,150.061 cw(c230.491,150.064) 230.487,150.061 ; 230.487,150.061 230.487,150.061 ; 230.487,150.061 230.487,150.061

## Silkscreen, mask and mechanical layers (free items; w line width, h text height)
Top Overlay:
  text "LEFT" at 158.075,144.25 h1.52
Mechanical 8:
  drawing of 304 lines, arcs and shapes, not listed
Mechanical 9:
  drawing of 620 lines, arcs and shapes, not listed
Mechanical 10:
  lines w0.01: 158.016,140.554 158.048,140.555 158.08,140.555 158.113,140.556 158.145,140.556 158.177,140.555 158.209,140.555 158.242,140.554 158.274,140.553 158.306,140.551 158.338,140.549 158.371,140.547 158.403,140.545 158.435,140.542 158.468,140.539 158.5,140.536 158.532,140.532 158.564,140.529 158.597,140.525 158.629,140.52 158.661,140.516 158.693,140.511 158.725,140.505 158.758,140.5 158.79,140.494 158.822,140.488 158.854,140.482 158.886,140.475 158.918,140.468 158.95,140.461 158.982,140.453 159.014,140.446 159.045,140.438 159.077,140.429 159.109,140.421 159.141,140.412 159.172,140.403 159.204,140.393 159.235,140.383 159.267,140.373 159.298,140.363 159.329,140.353 159.36,140.342 159.392,140.331 159.423,140.319 159.454,140.308 159.484,140.296 159.515,140.284 159.546,140.271 159.577,140.259 159.607,140.246 159.638,140.232 159.668,140.219 159.698,140.205 159.728,140.191 159.758,140.177 159.788,140.162 159.818,140.148 159.848,140.133 159.877,140.117 159.907,140.102 159.936,140.086 159.965,140.07 159.994,140.054 160.023,140.037 160.052,140.02 160.081,140.003 160.11,139.986 160.138,139.968 160.166,139.951 160.195,139.933 160.223,139.914 160.25,139.896 160.278,139.877 160.306,139.858 160.333,139.839 160.361,139.82 160.388,139.8 160.415,139.78 160.442,139.76 160.468,139.74 160.495,139.719 160.521,139.698 160.547,139.677 160.573,139.656 160.599,139.634 160.625,139.613 160.65,139.591 160.675,139.569 160.701,139.547 160.726,139.524 160.75,139.501 160.775,139.478 160.799,139.455 160.824,139.432 160.848,139.408 160.871,139.385 160.895,139.361 160.918,139.337 160.942,139.312 160.965,139.288 ; 158.156,140.556 cw(c158.165,141.556) 157.683,140.679 cw(c174.547,171.348) 152.66,144.036 cw(c153.285,144.817) 152.313,144.582 151.392,148.408 cw(c152.364,148.642) 151.553,149.227 cw(c183.995,125.829) 154.565,152.919 cw(c155.301,152.242) 154.776,153.092 ccw(c153.07,155.854) 155.881,154.231 cw(c156.747,153.73) 156.048,154.446 cw(c183.995,125.829) 163.975,160.458 cw(c193.54,-42.399) 168.895,161.114 ccw(c168.654,163.1) 170.596,162.62 cw(c172.659,162.111) 174.577,163.027 ccw(c176.381,163.888) 176.547,161.895 cw(c193.54,-42.399) 216.15,161.35 cw(c215.819,158.368) 217.248,161.006 224.201,157.239 cw(c222.772,154.601) 225.212,156.345 227.001,153.843 ccw(c227.407,154.133) 227.412,153.633 227.624,153.635 cw(c227.629,153.135) 228.036,153.426 230.491,149.989 cw(c230.084,149.699) 230.47,149.381 227.783,146.115 cw(c227.397,146.433) 227.401,145.933 226.693,145.926 ccw(c226.698,145.426) 226.312,145.744 220.51,138.694 cw(c218.193,140.6) 219.574,137.937 cw(c214.971,146.814) 215.066,136.815 213.51,136.8 ccw(c213.53,134.8) 211.771,135.753 cw(c209.903,136.765) 208.054,135.717 ccw(c206.314,134.731) 206.295,136.731 172.505,136.408 cw(c174.547,171.348) 161.462,138.887 cw(c161.836,139.815) 161.077,139.163 160.965,139.288